# Altium PCB CT_Test.PcbDoc
Units mil, origin at the board's own origin, x right, y up, seen from the top; angles counter-clockwise.
Board outline 2765 x 1870 mil, 2 copper layers (Top Layer, Bottom Layer); 13 components, 11 nets, 63 pads, 0 vias.
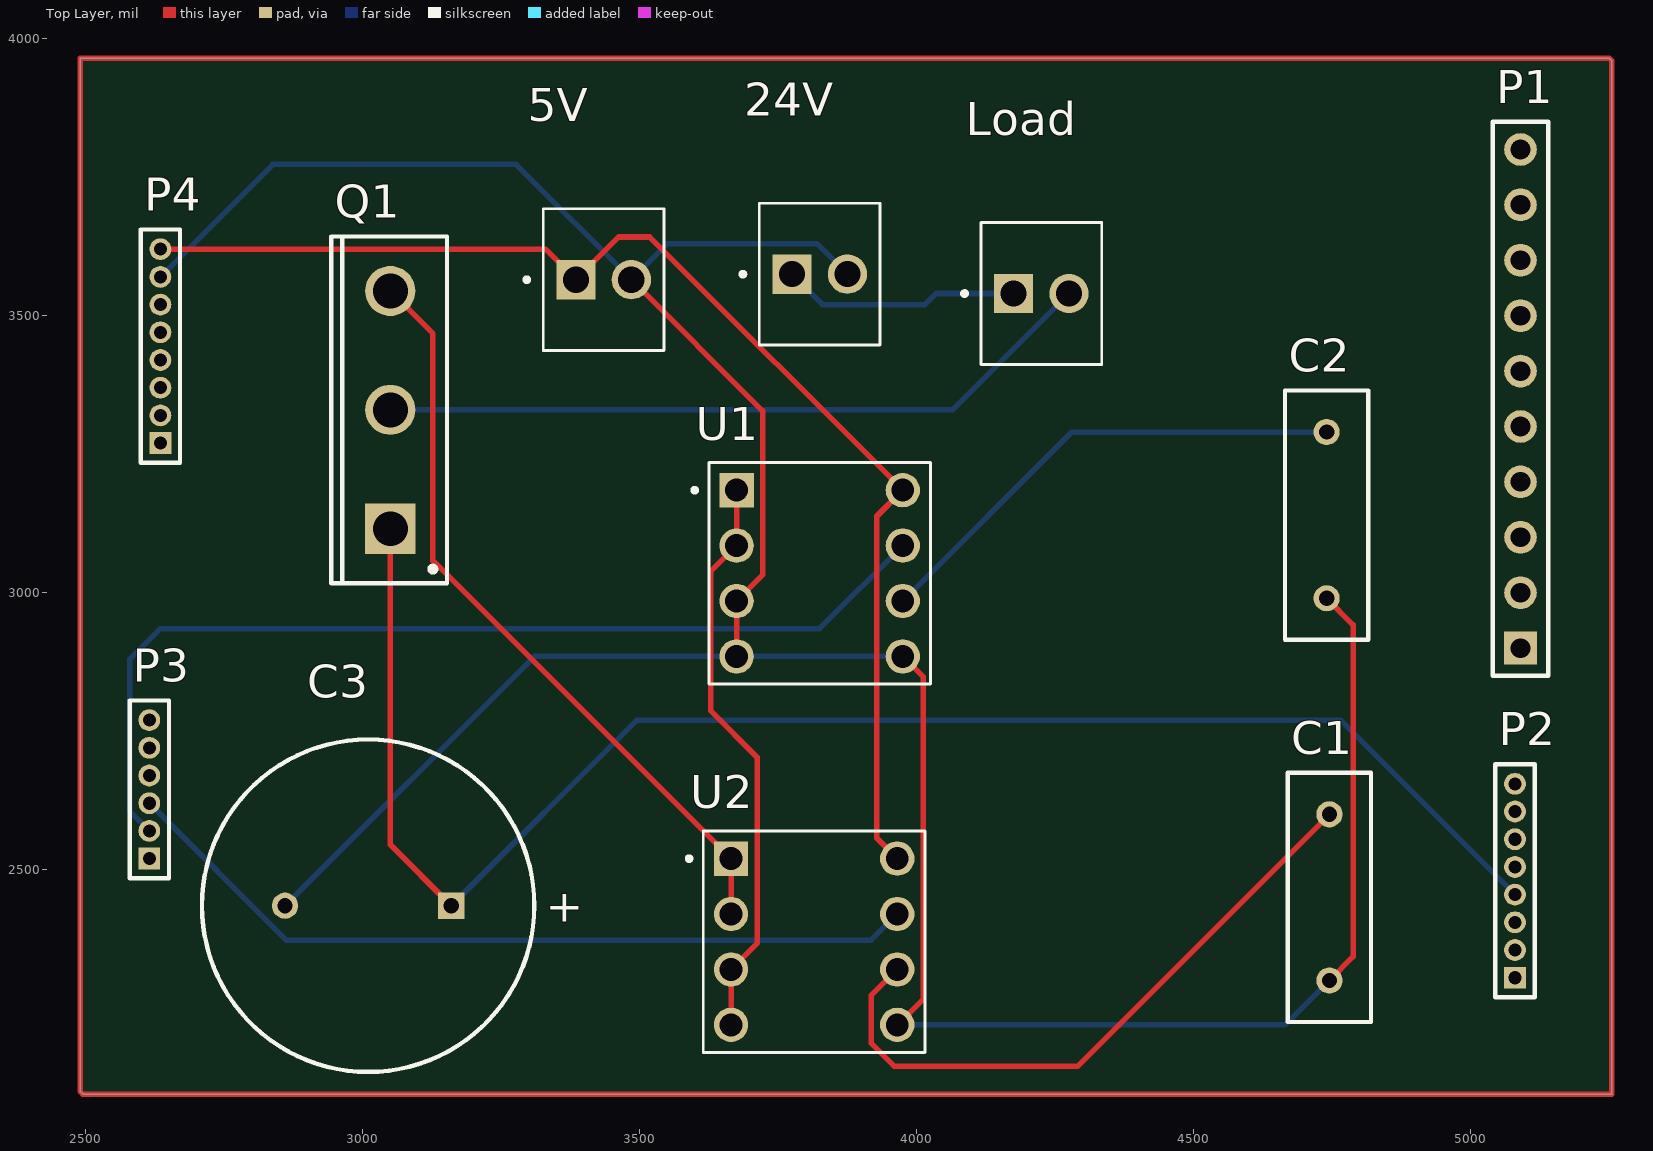
[diagram p0: Top Layer view]
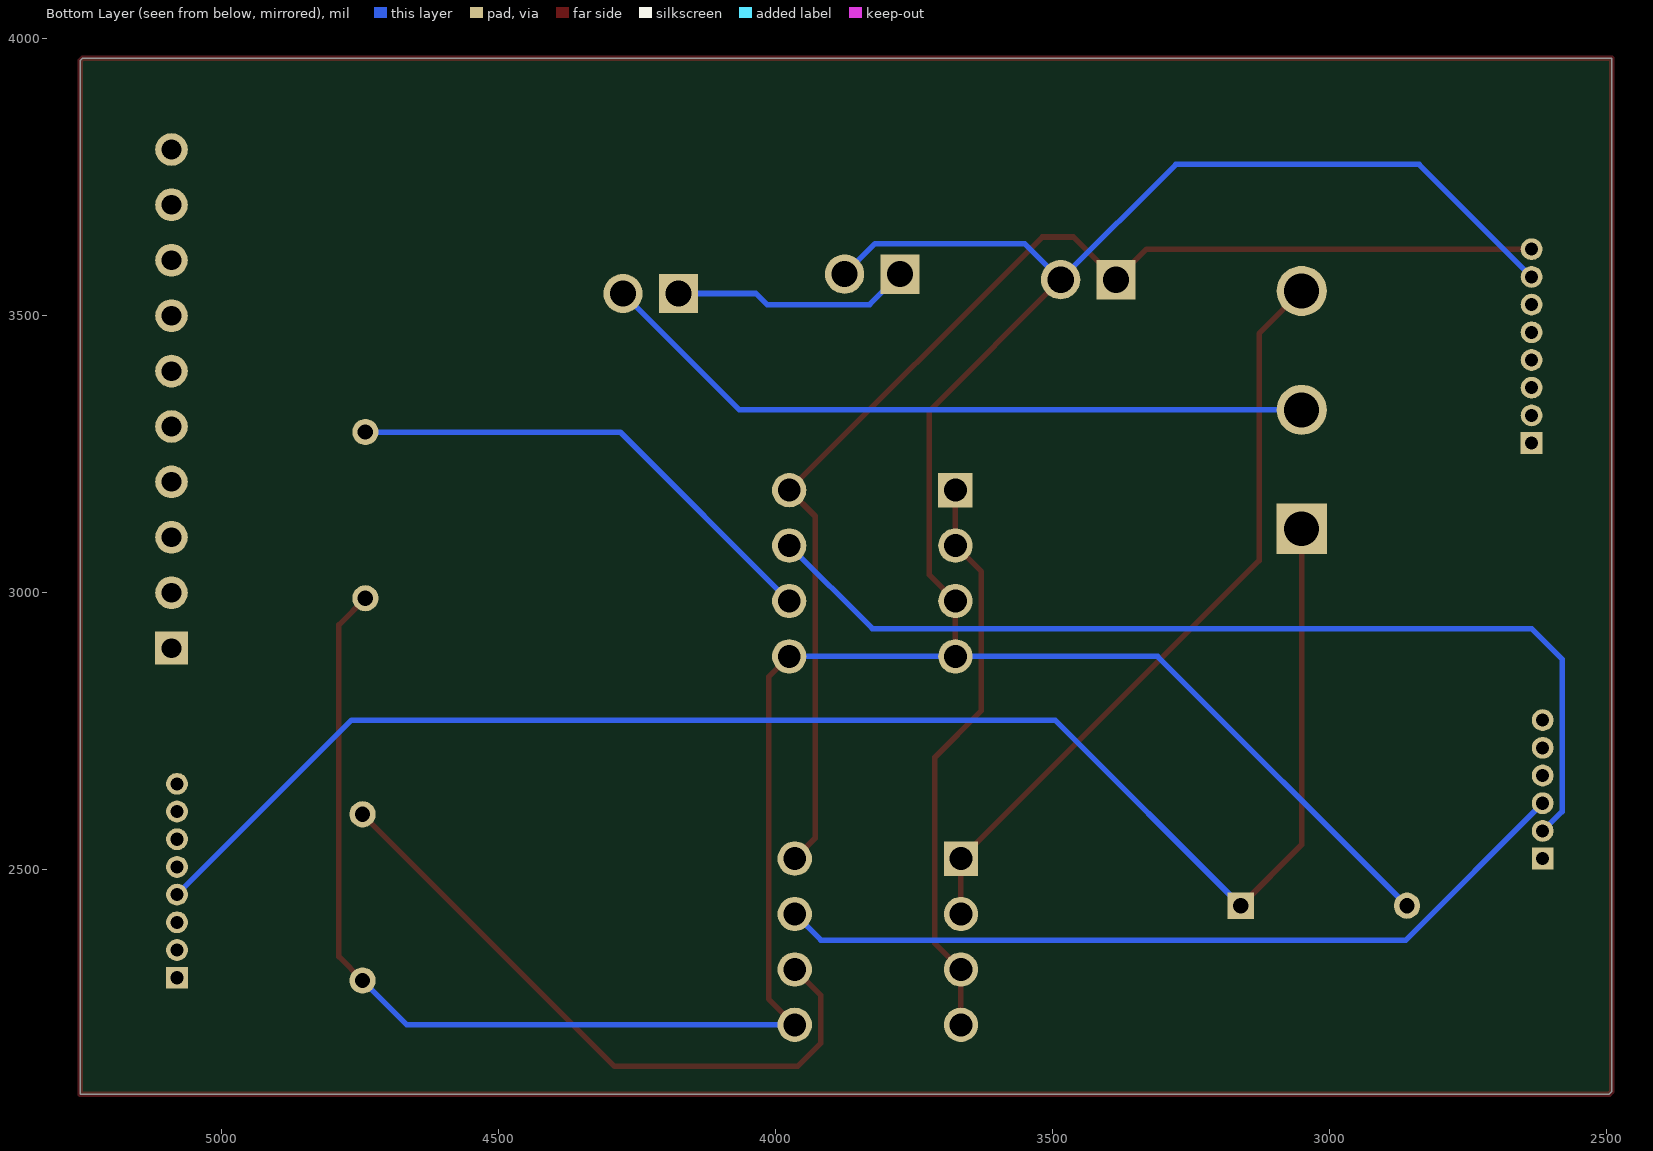
[diagram p1: Bottom Layer view, seen from below]

## Layer stack, top to bottom
Top Solder: solder mask 0.4, Solder Resist, Dk 3.5
Top Layer: signal copper 1.4
Dielectric 1: dielectric 12.6, FR-4, Dk 4.8
Bottom Layer: signal copper 1.4
Bottom Solder: solder mask 0.4, Solder Resist, Dk 3.5

## Board outline
2490,2100 2495,2095 5255,2095 5255,3960 5250,3965 2490,3965

## Design rules (kind name [scope] priority, off if disabled: settings)
Clearance [All] p1: gap=10 ignorepadtopadclearanceinfootprint=FALSE except(0: Arc-Hole Track-Hole SMDPad-Hole THPad-Hole Via-Hole Fill-Hole Poly-Hole Region-Hole Text-Hole)
PolygonConnect [All] p1: connectstyle=Relief reliefconductorwidth=10 reliefentries=4 polygonreliefangle="90 Angle" airgapwidth=10
RoutingVias [All] p1: holewidth=28 width=50 viastyle="Through Hole" minholewidth=28 minwidth=50 maxholewidth=28 maxwidth=50
SolderMaskExpansion [All] p1: expansion=4 istentingtop=FALSE
Width [All] p1: maxlimit=10 minlimit=10 preferedwidth=10
30 further rules are at their usual default settings.

## Components (designator, comment, footprint, x,y, rotation, side; value= is the part's Value field where it differs from the comment)
5V "282834-2" TE_282834-2 3435,3565 r0 top
24V "282834-2" TE_282834-2 3825,3575 r0 top
C1 "Cap" RAD-0.3 4745,2450 r90 top value=100pF
C2 "Cap" RAD-0.3 4740,3140 r90 top value=100pF
C3 "Cap Pol1" RB7.6-15 3010,2435 r0 top value=100pF
Load "282834-2" TE_282834-2 4225,3540 r0 top
P1 "Header 10" HDR1X10 5090,2900 r90 top
P2 "MHDR1X8" MHDR1X8 5080,2305 r90 top
P3 "MHDR1X6" MHDR1X6 2615,2520 r90 top
P4 "MHDR1X8" MHDR1X8 2635,3270 r90 top
Q1 "IGBT-N" TO-247 3050,3330 r90 top
U1 "DILB8P-223TLF" AMPHENOL_DILB8P-223TLF 3825,3035 r0 top
U2 "DILB8P-223TLF" AMPHENOL_DILB8P-223TLF 3815,2370 r0 top

## Footprints (in the part's own frame and the unit in brackets; to place one, negate y for a bottom-side part, rotate by r counter-clockwise, add the part's x,y. Pads: shape width x height; smd on the part's side, far side on the other; paste and mask are expansions set on the pad)
AMPHENOL_DILB8P-223TLF [mm]
  rect 1.575x1.575 hole 1.05: 01(-3.81,3.81)
  round 1.575 hole 1.05: 02(-3.81,1.27) 03(-3.81,-1.27) 04(-3.81,-3.81) 05(3.81,-3.81) 06(3.81,-1.27) 07(3.81,1.27) 08(3.81,3.81)
  silkscreen extent -5.83,-5.08 5.08,5.08, body extent -5.08,-5.08 5.08,5.08, height 5.25
HDR1X10 [mm] "Connector; Header; 10 Position"
  rect 1.5x1.5 hole 0.9: 1(0,0)
  round 1.5 hole 0.9: 2(2.54,0) 3(5.08,0) 4(7.62,0) 5(10.16,0) 6(12.7,0) 7(15.24,0) 8(17.78,0) 9(20.32,0) 10(22.86,0)
  silkscreen extent -1.27,-1.27 24.13,1.27
MHDR1X6 [mm] "Connector; Header; 6 Position"
  rect 1x1 hole 0.6: 1(0,0)
  round 1 hole 0.6: 2(1.27,0) 3(2.54,0) 4(3.81,0) 5(5.08,0) 6(6.35,0)
  silkscreen extent -0.9,-0.9 7.25,0.9
MHDR1X8 [mm] "Connector; Header; 8 Position"
  rect 1x1 hole 0.6: 1(0,0)
  round 1 hole 0.6: 2(1.27,0) 3(2.54,0) 4(3.81,0) 5(5.08,0) 6(6.35,0) 7(7.62,0) 8(8.89,0)
  silkscreen extent -0.9,-0.9 9.79,0.9
RAD-0.3 [mm] "Radial Cap, Thru-Hole; 2 Leads; 0.3 in Pin Spacing"
  round 1.2 hole 0.7: 1(-3.81,0) 2(3.81,0)
  silkscreen extent -5.71,-1.91 5.71,1.91
RB7.6-15 [mm] "Polarized Capacitor (Radial); 2 Leads"
  rect 1.2x1.2 hole 0.7: 1(3.81,0)
  round 1.2 hole 0.7: 2(-3.81,0)
  silkscreen extent -7.62,-7.62 7.62,7.62
TE_282834-2 [mm]
  rect 1.8x1.8 / inner round 1.8 / far side rect 1.8x1.8 hole 1.2: 1(-1.27,0)
  round 1.8 hole 1.2: 2(1.27,0)
  silkscreen extent -3.62,-3.25 2.77,3.25, body extent -2.77,0 2.77,6.5, height 7
TO-247 [mm] "SIP with Mounting Hole; 3 Leads; Body 20 x 15.6 x 5 mm (typ); Pitch 5.45 mm"
  rect 2.3x2.3 hole 1.6: 1(-5.45,0)
  round 2.3 hole 1.6: 2(0,0) 3(5.45,0)
  silkscreen extent -7.95,-2.6 7.95,2.7, body extent -7.95,-2.6 7.95,2.7, height 24.6

## Part data
5V 24V Load: "Wire-To-Board Terminal Block, 2, 150 V, 10 A, 30 Awg, 16 Awg, 1.4 Mm", Package=None, Availability="In Stock", Centerline_Pitch="2.54 mm[.1 in]", Check_prices=https://www.snapeda.com/parts/282834-2/TE+Connectivity+AMP+Connectors/view-part/?ref=eda, EU_RoHS_Compliance="Compliant with Exemptions", MF="TE Connectivity", MP=282834-2, Number_of_Positions=2, Price=None, Purchase-URL=https://pricing.snapeda.com/search/part/282834-2/?ref=eda, SnapEDA_Link=https://www.snapeda.com/parts/282834-2/TE+Connectivity+AMP+Connectors/view-part/?ref=snap
C1 C2: "Capacitor", LatestRevisionDate=17-Jul-2002, LatestRevisionNote="Re-released for DXP Platform.", PackageDescription="Radial Cap, Thru-Hole; 2 Leads; 0.3 in Pin Spacing", PackageReference=RAD-0.3, Published=8-Jun-2000, Publisher="Altium Limited"
C3: "Polarized Capacitor (Radial)", LatestRevisionDate=17-Jul-2002, LatestRevisionNote="Re-released for DXP Platform.", PackageDescription="Polarized Capacitor (Radial); 2 Leads", PackageReference=RB7.6-15, Published=8-Jun-2000, Publisher="Altium Limited"
P1: "Header, 10-Pin", LatestRevisionDate=17-Jul-2002, LatestRevisionNote="Re-released for DXP Platform.", Publisher="Altium Limited"
P2 P4: "Header, 8-Pin", LatestRevisionDate=17-Jul-2002, LatestRevisionNote="Re-released for DXP Platform.", Publisher="Altium Limited"
P3: "Header, 6-Pin", LatestRevisionDate=17-Jul-2002, LatestRevisionNote="Re-released for DXP Platform.", Publisher="Altium Limited"
Q1: "Insulated Gate Bipolar Transistor (N-Channel)", Code_JEDEC=TO-247-AC, ComponentLink1Description="Manufacturer Link", ComponentLink1URL=http://www.irf.com/, DatasheetVersion=PD-9.684A, LatestRevisionDate=17-Jul-2002, LatestRevisionNote="Re-released for DXP Platform.", PackageDescription="SIP with Mounting Hole; 3 Leads; Body 20 x 15.6 x 5 mm (typ); Pitch 5.45 mm", PackageReference=TO-247, Published=8-Jun-2000, Publisher="Altium Limited"
U1 U2: "DIP Socket, Stamped and Formed", Package=None, Availability="In Stock", Check_prices=https://www.snapeda.com/parts/DILB8P-223TLF/Amphenol+FCI/view-part/?ref=eda, MF="Amphenol ICC", MP=DILB8P-223TLF, Price=None, Purchase-URL=https://pricing.snapeda.com/search/part/DILB8P-223TLF/?ref=eda, SnapEDA_Link=https://www.snapeda.com/parts/DILB8P-223TLF/Amphenol+FCI/view-part/?ref=snap

## Nets (pads, with @x,y where several pads share a name; then routed paths per layer and width w, separated by ;. In a path a pad name is that pad's centre, name@x,y a point inside that pad or via, vN(x,y) a via of type N, cw(c..) or ccw(c..) an arc to the next point about the centre after c; other vN are vias at no path point)
GND: 5V.2 24V.2 C1.1 C2.1 C3.2 P4.7 U1.03 U1.04 U1.05 U2.05 | length 5799.6
  Top Layer w10: 5V.2 3722,3328 3722,3032 U1.03 U1.04 ; U2.05 4012,2267 4012,2848 U1.05 ; C2.1 4788,2942 4788,2343 C1.1
  Bottom Layer w10: P4.7 2838,3773 3277,3773 5V.2 3550,3630 3820,3630 24V.2 ; C3.2 3310,2885 U1.04 U1.05 ; U2.05 4665,2220 C1.1
Net5V_1: 5V.1 P4.8 U1.08 U2.08 | length 2283.8
  Top Layer w10: P4.8 3330,3620 5V.1 3462,3642 3518,3642 U1.08 3928,3138 3928,2557 U2.08
Net24V_1: 24V.1 Load.1 | length 431.1
  Bottom Layer w10: 24V.1 3830,3520 4015,3520 4035,3540 Load.1
NetC1_2: C1.2 U2.06 | length 1185.3
  Top Layer w10: U2.06 3918,2273 3918,2187 3960,2145 4290,2145 C1.2
NetC2_2: C2.2 U1.06 | length 891.3
  Bottom Layer w10: U1.06 4280,3290 C2.2
NetC3_1: C3.1 P2.4 Q1.1 | length 2915.2
  Top Layer w10: Q1.1 3050,2545 C3.1
  Bottom Layer w10: C3.1 3495,2770 4765,2770 P2.4
NetLoad_2: Load.2 Q1.2 | length 1312
  Bottom Layer w10: Q1.2 4065,3330 Load.2
NetP3_2: P3.2 U1.07 | length 1804.4
  Bottom Layer w10: P3.2 2580,2605 2580,2880 2635,2935 3825,2935 U1.07
NetP3_3: P3.3 U2.07 | length 1471.8
  Bottom Layer w10: P3.3 2862,2373 3918,2373 U2.07
NetQ1_3: Q1.3 U2.01 U2.02 | length 1379.3
  Top Layer w10: Q1.3 3127,3467.57 3127,3058 U2.01 U2.02
NetU1_01: U1.01 U1.02 U2.03 U2.04 | length 1038.7
  Top Layer w10: U2.04 U2.03 3712,2367 3712,2703 3628,2787 3628,3038 U1.02 U1.01
pads on no net: P1.1 P1.2 P1.3 P1.4 P1.5 P1.6 P1.7 P1.8 P1.9 P1.10 P2.1 P2.2 P2.3 P2.5 P2.6 P2.7 P2.8 P3.1 P3.4 P3.5 P3.6 P4.1 P4.2 P4.3 P4.4 P4.5 P4.6
copper on no net: | length 9264.1
  Top Layer w10: 2490,2100 2495,2095 5255,2095 5255,3960 5250,3965 2490,3965 2490,2100

## Text inside footprints (layer, text, board x,y; h text height)
C3: Top Overlay "+" at 3330.15,2405.99 h59.06